# Altium PCB PCB3.PcbDoc
Units mm, origin at the board's own origin, x right, y up, seen from the top; angles counter-clockwise.
Board outline 58.04 x 96.9 mm, 2 copper layers (Top Layer, Bottom Layer); 22 components, 91 nets, 164 pads, 0 vias.
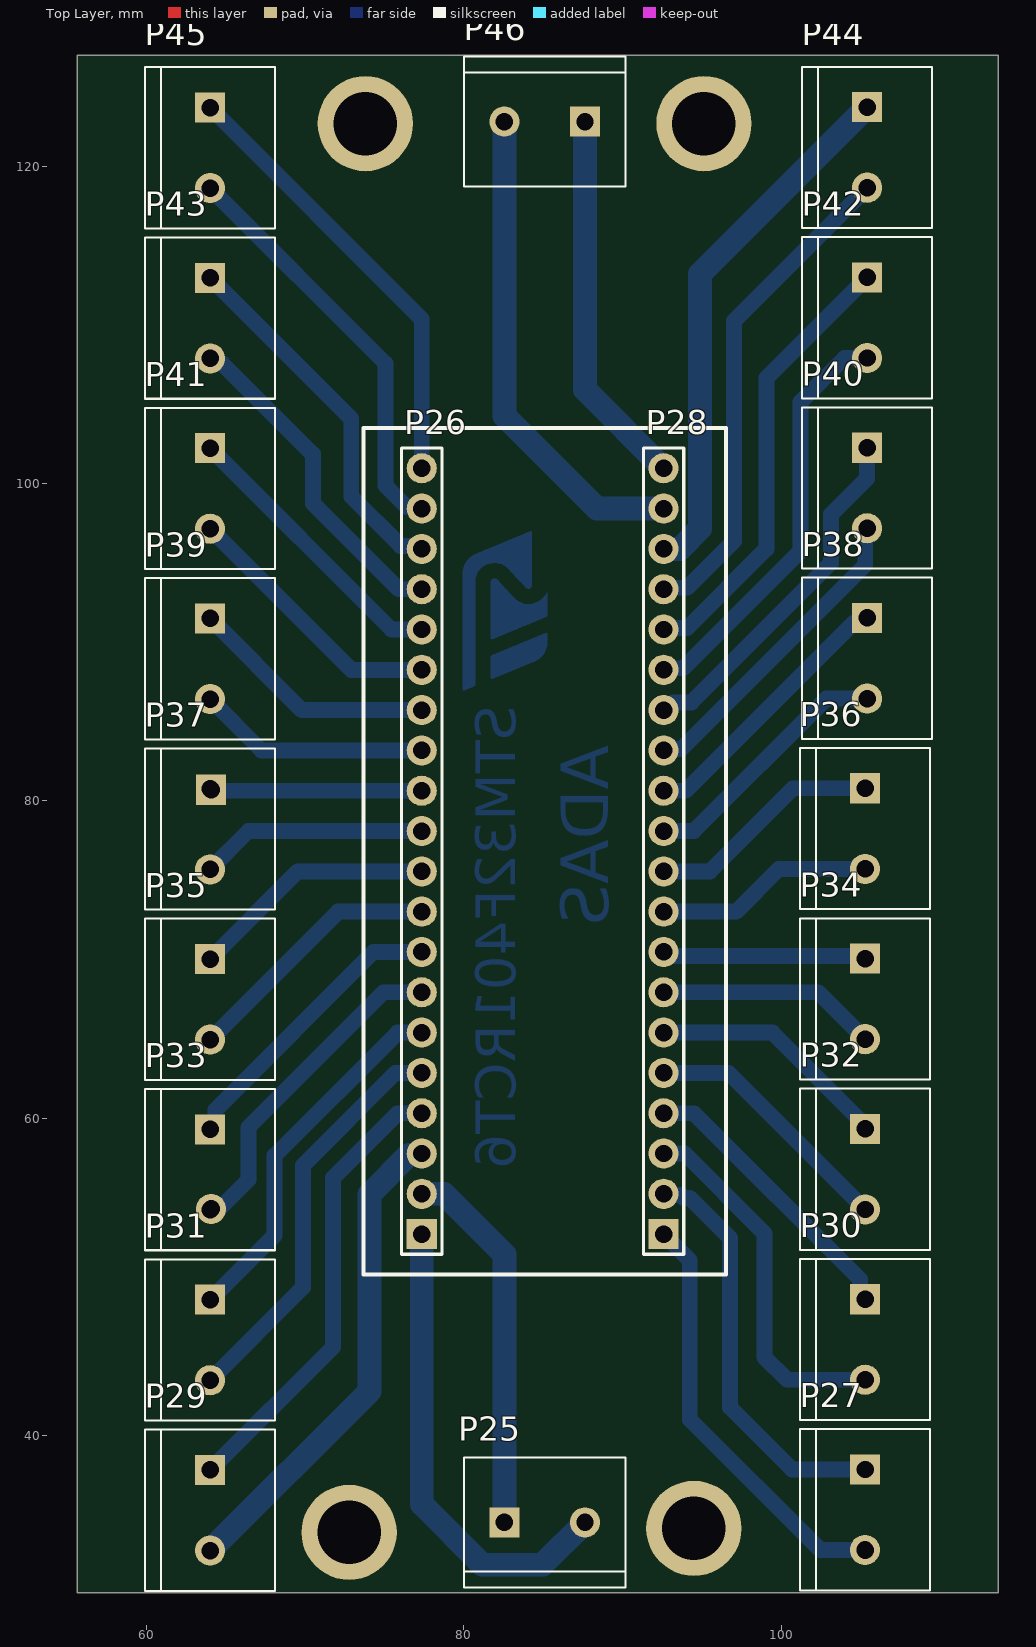
[diagram p0: Top Layer view]
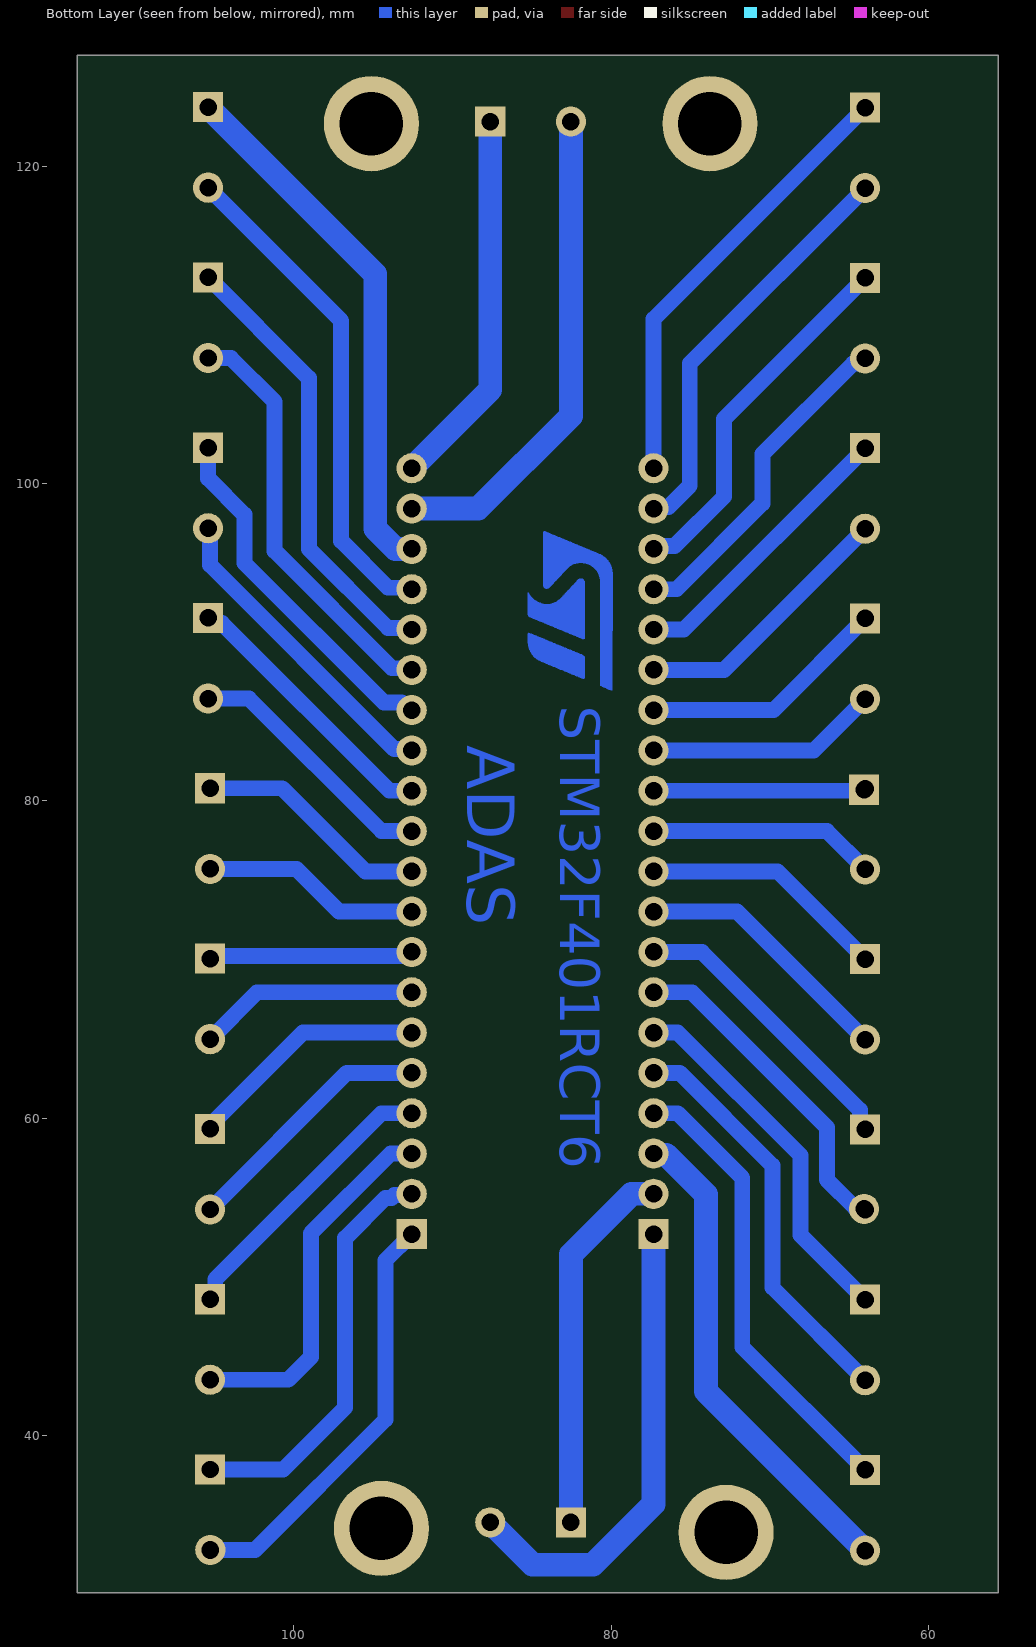
[diagram p1: Bottom Layer view, seen from below]
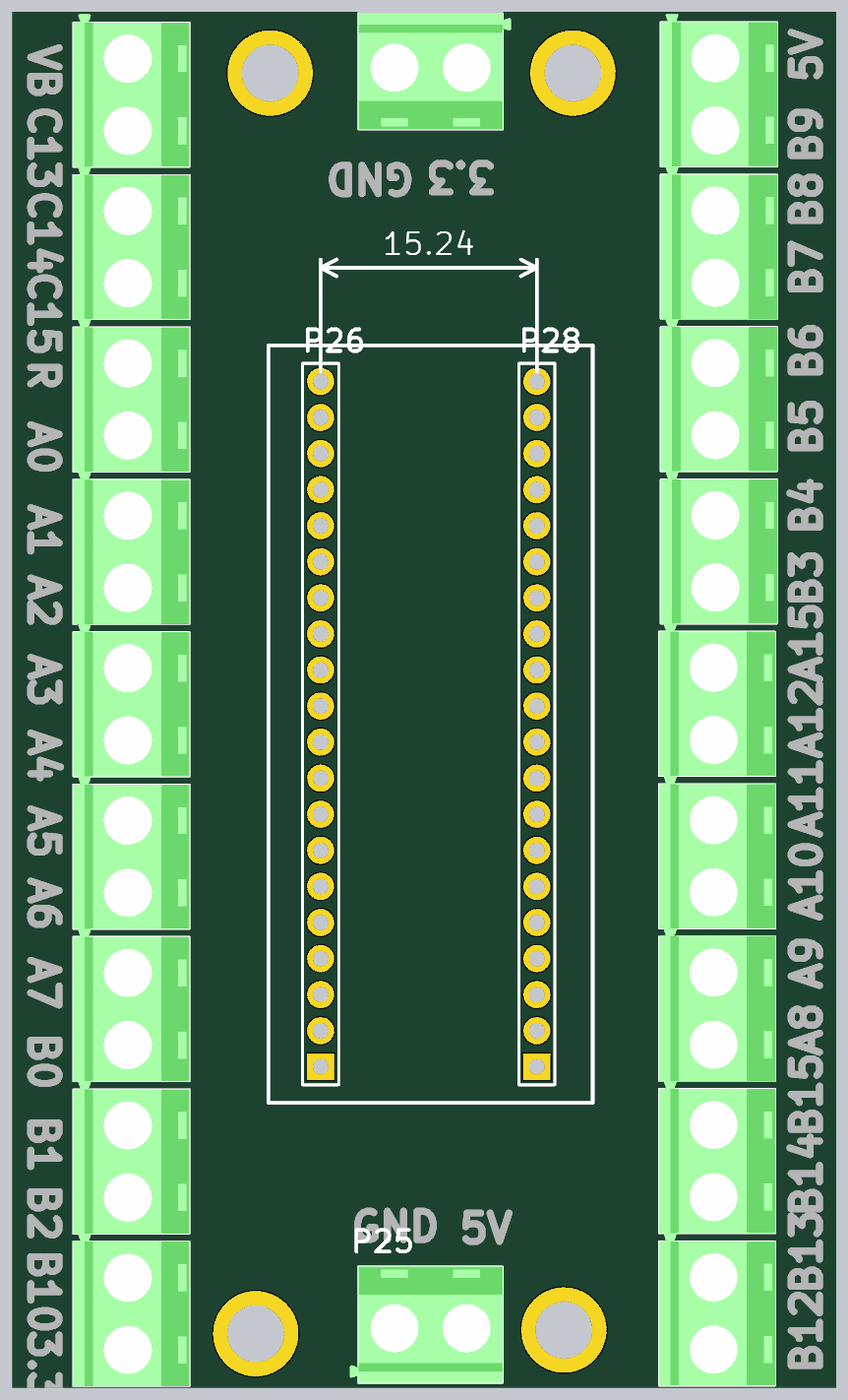
[diagram p2: 3D render of the assembled board from above, using the file's embedded part models]

## Layer stack, top to bottom
Top Solder: solder mask 0.0102, Solder Resist, Dk 3.5
Top Layer: signal copper 0.0356
Dielectric 1: dielectric 0.32, FR-4, Dk 4.8
Bottom Layer: signal copper 0.0356
Bottom Solder: solder mask 0.0102, Solder Resist, Dk 3.5

## Board outline
55.626,30.099 113.665,30.099 113.665,127 55.626,127

## Design rules (kind name [scope] priority, off if disabled: settings)
Clearance [All] p1: gap=0.6 ignorepadtopadclearanceinfootprint=FALSE
PolygonConnect [All] p1: connectstyle=Relief reliefconductorwidth=0.254 reliefentries=4 polygonreliefangle="90 Angle" airgapwidth=0.254
RoutingLayers [All] p1: top layer_v5=FALSE bottom layer_v5=TRUE
RoutingVias [All] p1: holewidth=0.711 width=1.27 viastyle="Through Hole" minholewidth=0.711 minwidth=1.27 maxholewidth=0.711 maxwidth=1.27
SolderMaskExpansion [All] p1: expansion=0.102 istentingtop=FALSE
Width [All] p1: maxlimit=1 minlimit=1 preferedwidth=1 minimp=50.000000 maximp=50.000000 favimp=50.000000
29 further rules are at their usual default settings.

## Components (designator, comment, footprint, x,y, rotation, side; value= is the part's Value field where it differs from the comment)
P25 "282837-2" TE_282837-2 85.09,34.544 r0 top
P26 "Header 20" HDR1X20 77.343,52.705 r90 top
P27 "282837-2" TE_282837-2 105.283,35.334 r270 top
P28 "Header 20" HDR1X20 92.583,52.705 r90 top
P29 "282837-2" TE_282837-2 64.008,35.306 r270 top
P30 "282837-2" TE_282837-2 105.283,46.066 r270 top
P31 "282837-2" TE_282837-2 64.008,46.038 r270 top
P32 "282837-2" TE_282837-2 105.283,56.797 r270 top
P33 "282837-2" TE_282837-2 64.008,56.769 r270 top
P34 "282837-2" TE_282837-2 105.283,67.529 r270 top
P35 "282837-2" TE_282837-2 64.008,67.501 r270 top
P36 "282837-2" TE_282837-2 105.283,78.26 r270 top
P37 "282837-2" TE_282837-2 64.008,78.232 r270 top
P38 "282837-2" TE_282837-2 105.41,88.992 r270 top
P39 "282837-2" TE_282837-2 64.008,88.963 r270 top
P40 "282837-2" TE_282837-2 105.41,99.723 r270 top
P41 "282837-2" TE_282837-2 64.008,99.695 r270 top
P42 "282837-2" TE_282837-2 105.41,110.455 r270 top
P43 "282837-2" TE_282837-2 64.008,110.426 r270 top
P44 "282837-2" TE_282837-2 105.41,121.186 r270 top
P45 "282837-2" TE_282837-2 64.008,121.158 r270 top
P46 "282837-2" TE_282837-2 85.09,122.809 r180 top

## Footprints (in the part's own frame and the unit in brackets; to place one, negate y for a bottom-side part, rotate by r counter-clockwise, add the part's x,y. Pads: shape width x height; smd on the part's side, far side on the other; paste and mask are expansions set on the pad)
HDR1X20 [mm] "Connector; Header; 20 Position"
  rect 1.5x1.5 hole 0.9: 1(0,0)
  round 1.5 hole 0.9: 2(2.54,0) 3(5.08,0) 4(7.62,0) 5(10.16,0) 6(12.7,0) 7(15.24,0) 8(17.78,0) 9(20.32,0) 10(22.86,0) 11(25.4,0) 12(27.94,0) 13(30.48,0) 14(33.02,0) 15(35.56,0) 16(38.1,0) 17(40.64,0) 18(43.18,0) 19(45.72,0) 20(48.26,0)
  silkscreen extent -1.27,-1.27 49.53,1.27
TE_282837-2 [mm]
  rect 1.65x1.65 / inner round 1.65 / far side rect 1.65x1.65 hole 1.1: 1(-2.54,0)
  round 1.65 hole 1.1: 2(2.54,0)
  silkscreen extent -5.08,-4.1 5.08,4.1, body extent -5.68,-4.1 5.08,4.1, height 10

## Part data
P25 P27 P29 P30 P31 P32 P33 P34 P35 P36 P37 P38 P39 P40 P41 P42 P43 P44 P45 P46: "Ð Ð°Ð·ÑŠÐµÐ¼Ð½Ñ‹Ðµ ÐºÐ»ÐµÐ¼Ð¼Ð½Ñ‹Ðµ ÐºÐ¾Ð»Ð¾Ð´ÐºÐ¸ Ð Ð¾Ð·ÐµÑ‚ÐºÐ° 2 Ð¿Ð¾Ð»Ð¾Ð¶ÐµÐ½Ð¸Ñ 5,08 Ð¼Ð¼ ÐŸÑ€Ð¸Ð¿Ð¾Ð¹ Ð¿Ñ€ÑÐ¼Ð¾Ð¹ Ñ‡ÐµÑ€ÐµÐ· Ð¾Ñ‚Ð²ÐµÑ€ÑÑ‚Ð¸Ðµ 13,5 Ð / ÐºÐ¾Ð½Ñ‚Ð°ÐºÑ‚", Package=None, Availability="In Stock", Check_prices=https://www.snapeda.com/parts/282837-2/TE+Connectivity+AMP+Connectors/view-part/?ref=eda, MF="TE Connectivity", MP=282837-2, Price=None, Purchase-URL=https://pricing.snapeda.com/search/part/282837-2/?ref=eda
  P25 P27 P29 P30 P31 P32 P33 P34 P35 P36 P37 P38 P39 P40 P41 P42 P43 P44 P45: SnapEDA_Link=https://www.snapeda.com/parts/282837-2/TE+Connectivity+AMP+Connectors/view-part/?ref=snap
P26 P28: "Header, 20-Pin", LatestRevisionDate=17-Jul-2002, LatestRevisionNote="Re-released for DXP Platform.", Publisher="Altium Limited"

## Free pads (board coordinates)
  round 6 hole 4: 11(72.771,33.909) 11(73.787,122.682) 11(94.488,34.163) 11(95.123,122.682)
  round 1.9 hole 1.1: 15(77.343,100.965) 16(77.343,98.425) 17(77.343,95.885) 18(77.343,93.345) 19(77.343,90.805) 20(77.343,88.265) 21(77.343,85.725) 22(77.343,83.185) 23(77.343,80.645) 24(77.343,78.105) 25(77.343,75.565) 26(77.343,73.025) 27(77.343,70.485) 28(77.343,67.945) 29(77.343,65.405) 30(77.343,62.865) 31(77.343,60.325) 32(77.343,57.785) 33(77.343,55.245) 36(92.583,55.245) 37(92.583,57.785) 38(92.583,60.325) 39(92.583,62.865) 40(92.583,65.405) 41(92.583,67.945) 42(92.583,70.485) 43(92.583,73.025) 44(92.583,75.565) 45(92.583,78.105) 46(92.583,80.645) 47(92.583,83.185) 48(92.583,85.725) 49(92.583,88.265) 50(92.583,90.805) 51(92.583,93.345) 52(92.583,100.965) 53(92.583,98.425) 54(92.583,95.885) 55(64.008,118.618) 56(64.008,107.886) 57(64.008,97.155) 58(64.008,86.423) 59(64.008,75.692) 60(64.008,64.96) 61(64.07,54.291) 62(64.008,43.497) 63(64.008,32.766) 64(87.63,34.544) 65(105.273,32.805) 66(105.283,43.526) 67(105.283,54.257) 68(105.283,64.989) 69(105.283,75.72) 70(105.41,86.452) 71(105.41,97.183) 72(105.41,107.915) 73(105.41,118.646) 74(82.55,122.809)
  rect 1.9x1.9 hole 1.1: 34(77.343,52.705) 35(92.583,52.705) 75(87.63,122.809) 76(64.008,123.698) 77(64.008,112.966) 78(64.008,102.235) 79(64.008,91.504) 80(64.072,80.709) 81(64.008,70.04) 84(64.008,59.309) 85(64.008,48.578) 86(64.008,37.846) 87(82.55,34.544) 88(105.283,37.874) 89(105.283,48.606) 90(105.283,59.337) 91(105.283,70.069) 92(105.283,80.8) 93(105.41,91.532) 94(105.41,123.726) 95(105.41,112.995) 96(105.41,102.263)

## Nets (pads, with @x,y where several pads share a name; then routed paths per layer and width w, separated by ;. In a path a pad name is that pad's centre, name@x,y a point inside that pad or via, vN(x,y) a via of type N, cw(c..) or ccw(c..) an arc to the next point about the centre after c; other vN are vias at no path point)
3.3: 
+3.3: 
+5: 
GND: 
GND5: 
i1: 
i2: 
i3: 
i4: 
i5: 
i6: 
i7: 
i8: 
NetC1_1: 
NetF1_2: 
NetP25_1: P25.1 P26.2 pad.33 pad.87 | length 23.7
  Bottom Layer w1.5: pad.33 78.74,55.245 82.55,51.435 pad.87
NetP25_2: P25.2 P26.1 pad.34 pad.64 | length 30
  Bottom Layer w1.5: pad.34 77.343,35.687 81.153,31.877 84.963,31.877 pad.64
NetP26_3: P26.3 P29.2 pad.32 pad.63 | length 30.9
  Bottom Layer w1.5: pad.63 74.041,42.799 74.041,55.196 76.554,57.708 77.228,57.708 pad.32@77.324,57.804
NetP26_4: P26.4 P29.1 pad.31 pad.86 | length 28.9
  Bottom Layer w1: pad.86 71.755,45.593 71.755,56.261 75.819,60.325 pad.31
NetP26_5: P26.5 P31.2 pad.30 pad.62 | length 25.9
  Bottom Layer w1: pad.62 69.85,49.34 69.85,57.023 75.692,62.865 pad.30
NetP26_6: P26.6 P31.1 pad.29 pad.85 | length 23.2
  Bottom Layer w1: pad.85 68.072,52.642 68.072,57.658 75.819,65.405 pad.29
NetP26_7: P26.7 P33.2 pad.28 pad.61 | length 20.9
  Bottom Layer w1: P33.2 64.132,54.353 64.64,54.353 66.421,56.134 66.421,59.436 74.93,67.945 pad.28@77.267,67.945
NetP26_8: P26.8 P33.1 pad.27 pad.84 | length 18.5
  Bottom Layer w1: pad.84 64.333,59.634 64.333,60.523 74.295,70.485 pad.27
NetP26_9: P26.9 P35.2 pad.26 pad.60 | length 16.7
  Bottom Layer w1: pad.60 72.072,73.025 pad.26
NetP26_10: P26.10 P35.1 pad.25 pad.81 | length 15.6
  Bottom Layer w1: pad.81 69.532,75.565 pad.25
NetP26_11: P26.11 P37.2 pad.24 pad.59 | length 14.3
  Bottom Layer w1: pad.59 66.421,78.105 pad.24
NetP26_12: P26.12 P37.1 pad.23 pad.80 | length 13.4
  Bottom Layer w1: P37.1 64.135,80.645 pad.23
NetP26_13: P26.13 P39.2 pad.22 pad.58 | length 14.7
  Bottom Layer w1: pad.58 67.246,83.185 pad.22
NetP26_14: P26.14 P39.1 pad.21 pad.79 | length 15.7
  Bottom Layer w1: pad.79 69.787,85.725 pad.21
NetP26_15: P26.15 P41.2 pad.20 pad.57 | length 17
  Bottom Layer w1: pad.57 72.898,88.265 pad.20
NetP26_16: P26.16 P41.1 pad.19 pad.78 | length 18.1
  Bottom Layer w1: pad.78 75.438,90.805 pad.19
NetP26_17: P26.17 P43.2 pad.18 pad.56 | length 21.2
  Bottom Layer w1: pad.56 64.184,107.886 64.509,107.562 64.777,107.562 70.485,101.854 70.485,98.755 75.895,93.345 pad.18
NetP26_18: P26.18 P43.1 pad.17 pad.77 | length 23.3
  Bottom Layer w1: pad.77 72.898,104.076 72.898,99.187 76.01,96.075 76.8,96.075 76.894,95.981 77.247,95.981 pad.17
NetP26_19: P26.19 P45.2 pad.16 pad.55 | length 26.2
  Bottom Layer w1: pad.55 75.057,107.569 75.057,99.873 76.409,98.521 pad.16
NetP26_20: P26.20 P45.1 pad.15 pad.76 | length 28.3
  Bottom Layer w1: pad.76 77.343,110.363 pad.15
NetP27_1: P27.1 P28.2 pad.36 pad.88 | length 26.1
  Bottom Layer w1: pad.36 92.666,55.162 93.682,55.162 93.853,54.991 94.233,54.991 96.774,52.45 96.774,41.783 100.683,37.874 pad.88
NetP27_2: P27.2 P28.1 pad.35 pad.65 | length 26.8
  Bottom Layer w1: pad.35 94.234,51.054 94.234,41.021 102.45,32.805 pad.65 P27.2
NetP28_3: P28.3 P30.2 pad.37 pad.66 | length 23.2
  Bottom Layer w1: pad.37 93.904,57.785 98.933,52.756 98.933,44.958 100.365,43.526 pad.66
NetP28_4: P28.4 P30.1 pad.38 pad.89 | length 18.1
  Bottom Layer w1: pad.38 94.488,60.325 104.958,49.855 104.958,48.931 pad.89
NetP28_5: P28.5 P32.2 pad.39 pad.67 | length 16.3
  Bottom Layer w1: pad.39 96.675,62.865 pad.67
NetP28_6: P28.6 P32.1 pad.40 pad.90 | length 15.3
  Bottom Layer w1: pad.40 99.441,65.405 104.958,59.888 104.958,59.662 pad.90
NetP28_7: P28.7 P34.2 pad.41 pad.68 | length 13.9
  Bottom Layer w1: pad.41 102.327,67.945 pad.68
NetP28_8: P28.8 P34.1 pad.42 pad.91 | length 12.9
  Bottom Layer w1: pad.42 92.718,70.485 92.972,70.231 105.121,70.231 pad.91
NetP28_9: P28.9 P36.2 pad.43 pad.69 | length 13.8
  Bottom Layer w1: pad.43 97.155,73.025 99.85,75.72 pad.69
NetP28_10: P28.10 P36.1 pad.44 pad.92 | length 14.9
  Bottom Layer w1: pad.44 95.504,75.565 100.739,80.8 pad.92
NetP28_11: P28.11 P38.2 pad.45 pad.70 | length 16.3
  Bottom Layer w1: pad.45 94.488,78.105 102.835,86.452 pad.70
NetP28_12: P28.12 P38.1 pad.46 pad.93 | length 17.3
  Bottom Layer w1: pad.46 93.98,80.645 104.542,91.207 105.085,91.207 pad.93
NetP28_13: P28.13 P40.2 pad.47 pad.71 | length 19.9
  Bottom Layer w1: pad.47 92.666,83.268 93.682,83.268 105.286,94.872 105.286,97.059 pad.71
NetP28_14: P28.14 P40.1 pad.48 pad.96 | length 22.5
  Bottom Layer w1: pad.48@92.659,85.725 92.718,85.725 93.208,86.215 94.343,86.215 103.124,94.996 103.124,98.044 105.41,100.33 pad.96
NetP28_15: P28.15 P42.2 pad.49 pad.72 | length 26.5
  Bottom Layer w1: pad.49 92.679,88.361 93.822,88.361 101.219,95.758 101.219,105.156 103.978,107.915 pad.72
NetP28_16: P28.16 P42.1 pad.50 pad.95 | length 28.3
  Bottom Layer w1: pad.50 92.679,90.901 94.076,90.901 99.06,95.885 99.06,106.645 pad.95
NetP28_17: P28.17 P44.2 pad.51 pad.73 | length 31.4
  Bottom Layer w1: pad.51 92.679,93.441 94.076,93.441 97.028,96.393 97.028,110.264 pad.73
NetP28_18: P28.18 P44.1 pad.54 pad.94 | length 33.8
  Bottom Layer w1.5: pad.54 93.609,95.885 94.883,97.159 94.883,113.199 pad.94
NetP28_19: P28.19 P46.2 pad.53 pad.74 | length 31
  Bottom Layer w1.5: pad.74 82.55,104.267 88.392,98.425 pad.53
NetP28_20: P28.20 P46.1 pad.52 pad.75 | length 23.9
  Bottom Layer w1.5: pad.75 87.63,105.918 pad.52
NetQ1_2: 
NetQ2_2: 
NetQ3_2: 
NetQ4_2: 
NetQ5_2: 
NetQ6_2: 
NetQ7_2: 
NetQ8_2: 
NetQ9_2: 
NetQ10_2: 
NetQ11_2: 
NetQ12_2: 
o1: 
o2: 
o3: 
o4: 
o5: 
o6: 
o7: 
o8: 
o9: 
o10: 
o11: 
o12: 
p1: 
p2: 
p3: 
p4: 
p5: 
p6: 
p7: 
p8: 
p9: 
p10: 
p11: 
p12: 

## Other copper
Bottom Layer:
  region: 280 vertices and 0 holes, not listed, extent 81.688,90.195 85.266,94.02
  region: 249 vertices and 0 holes, not listed, extent 81.688,87.699 85.261,90.586
  region: 366 vertices and 0 holes, not listed, extent 79.925,86.974 84.286,96.989
  text "STM32F401RCT6" at 83.22,86.014 h2.5 r90
  text "ADAS" at 89.089,83.501 h3 r90

## Silkscreen, mask and mechanical layers (free items; w line width, h text height)
Top Overlay:
  lines w0.254: 73.66,50.165 96.52,50.165 96.52,103.505 73.66,103.505 73.66,50.165
Top Paste:
  text "VB" at 56.888,124.976 h2 r270
  text "5V" at 112.53,121.785 h2 r90
  text "C13" at 56.888,120.658 h2 r270
  text "3.3" at 89.924,116.34 h2 r180
  text "GND" at 84.209,116.213 h2 r180
  text "B9" at 112.53,116.07 h2 r90
  text "C14" at 56.888,114.689 h2 r270
  text "B8" at 112.53,111.498 h2 r90
  text "C15" at 56.888,108.974 h2 r270
  text "B7" at 112.53,106.672 h2 r90
  text "R" at 56.888,102.751 h2 r270
  text "B6" at 112.53,100.83 h2 r90
  text "A0" at 56.888,98.433 h2 r270
  text "B5" at 112.53,95.496 h2 r90
  text "A1" at 56.888,92.591 h2 r270
  text "B4" at 112.53,89.908 h2 r90
  text "A2" at 56.888,87.638 h2 r270
  text "B3" at 112.53,84.828 h2 r90
  text "A3" at 56.888,82.05 h2 r270
  text "A15" at 112.53,79.494 h2 r90
  text "A4" at 56.888,76.716 h2 r270
  text "A12" at 112.53,74.16 h2 r90
  text "A5" at 56.888,71.382 h2 r270
  text "A11" at 112.53,68.572 h2 r90
  text "A6" at 56.888,66.302 h2 r270
  text "A10" at 112.53,62.73 h2 r90
  text "A7" at 56.888,60.714 h2 r270
  text "A9" at 112.53,57.904 h2 r90
  text "B0" at 56.888,55.38 h2 r270
  text "A8" at 112.53,53.205 h2 r90
  text "B1" at 56.888,49.538 h2 r270
  text "B15" at 112.53,47.49 h2 r90
  text "B2" at 56.888,44.712 h2 r270
  text "B14" at 112.53,41.902 h2 r90
  text "GND" at 79.24,40.505 h2
  text "5V" at 86.86,40.378 h2
  text "B10" at 56.888,40.14 h2 r270
  text "B13" at 112.53,36.441 h2 r90
  text "3.3" at 56.888,34.425 h2 r270
  text "B12" at 112.53,30.853 h2 r90

## Dimensions
77.343,100.965 to 92.583,100.965 on Top Overlay